# Altium PCB PCB1.PcbDoc
Units mm, origin at the board's own origin, x right, y up, seen from the top; angles counter-clockwise.
Board outline 159.6 x 109.6 mm, 2 copper layers (Top Layer, Bottom Layer); 22 components, 44 nets, 987 pads, 44 vias.
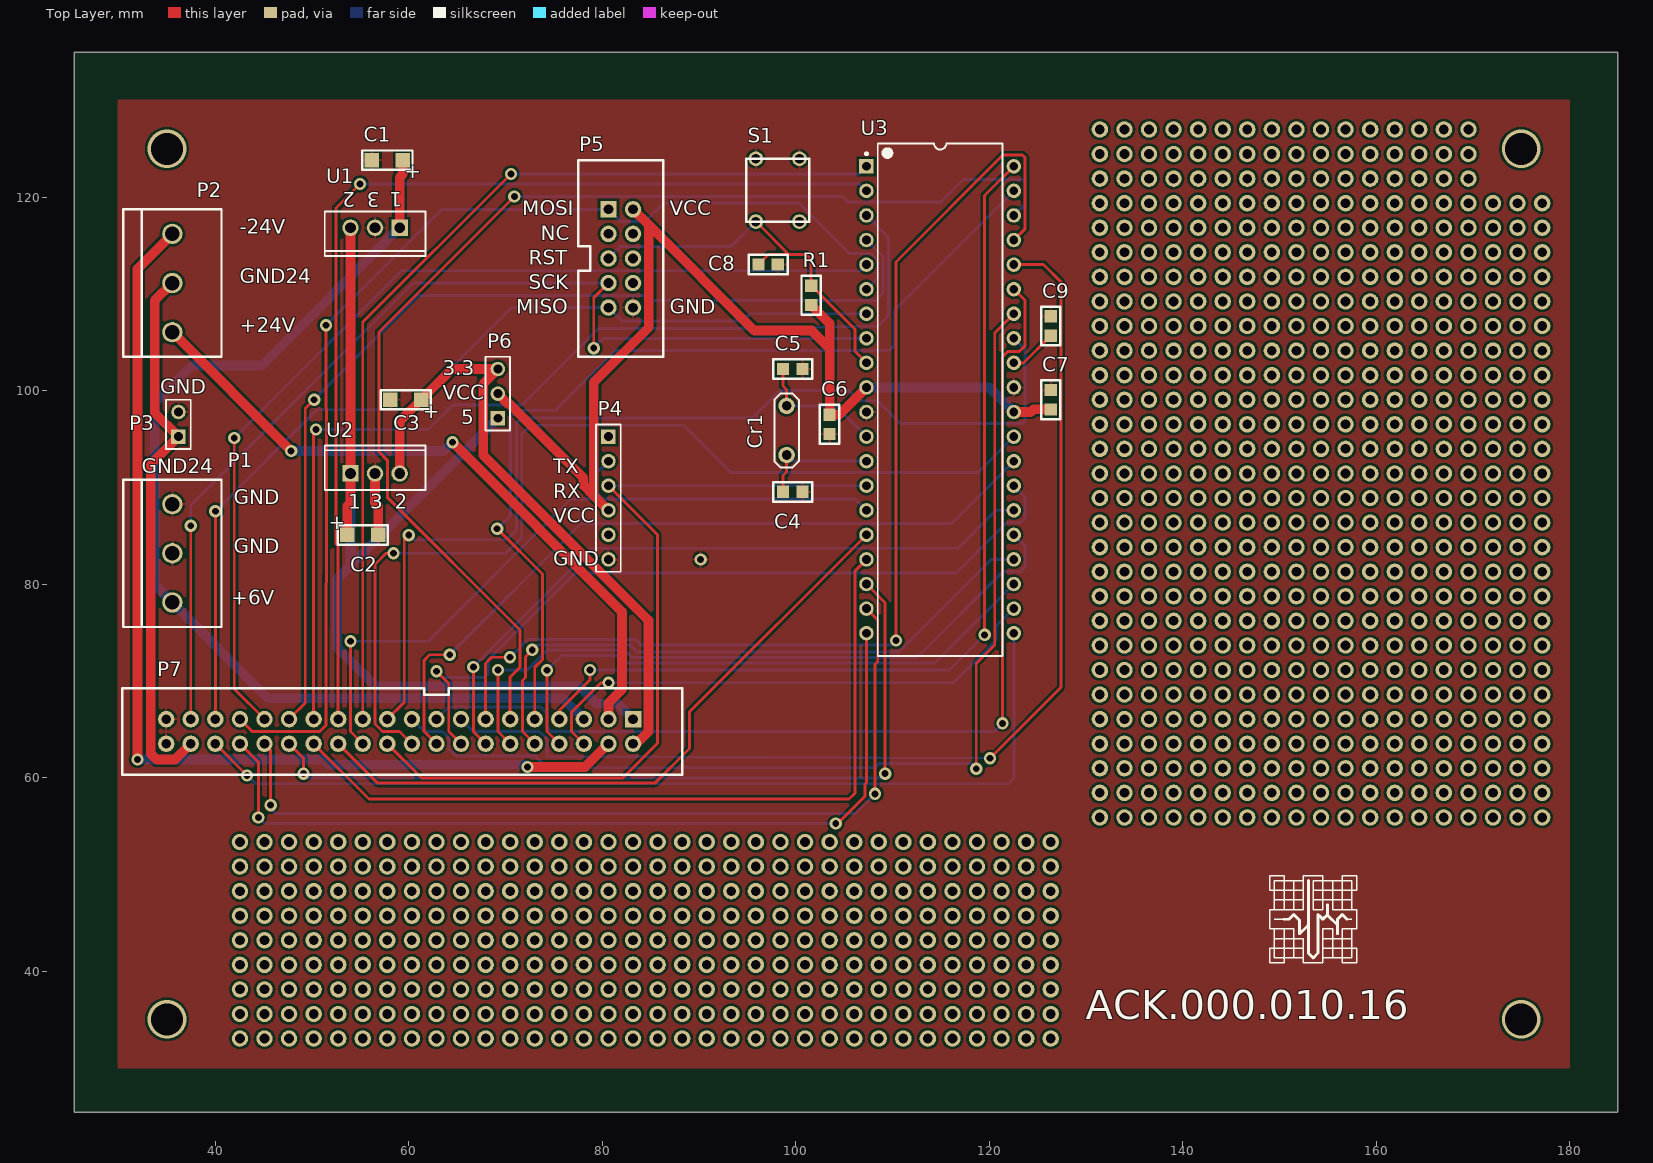
[diagram p0: Top Layer view]
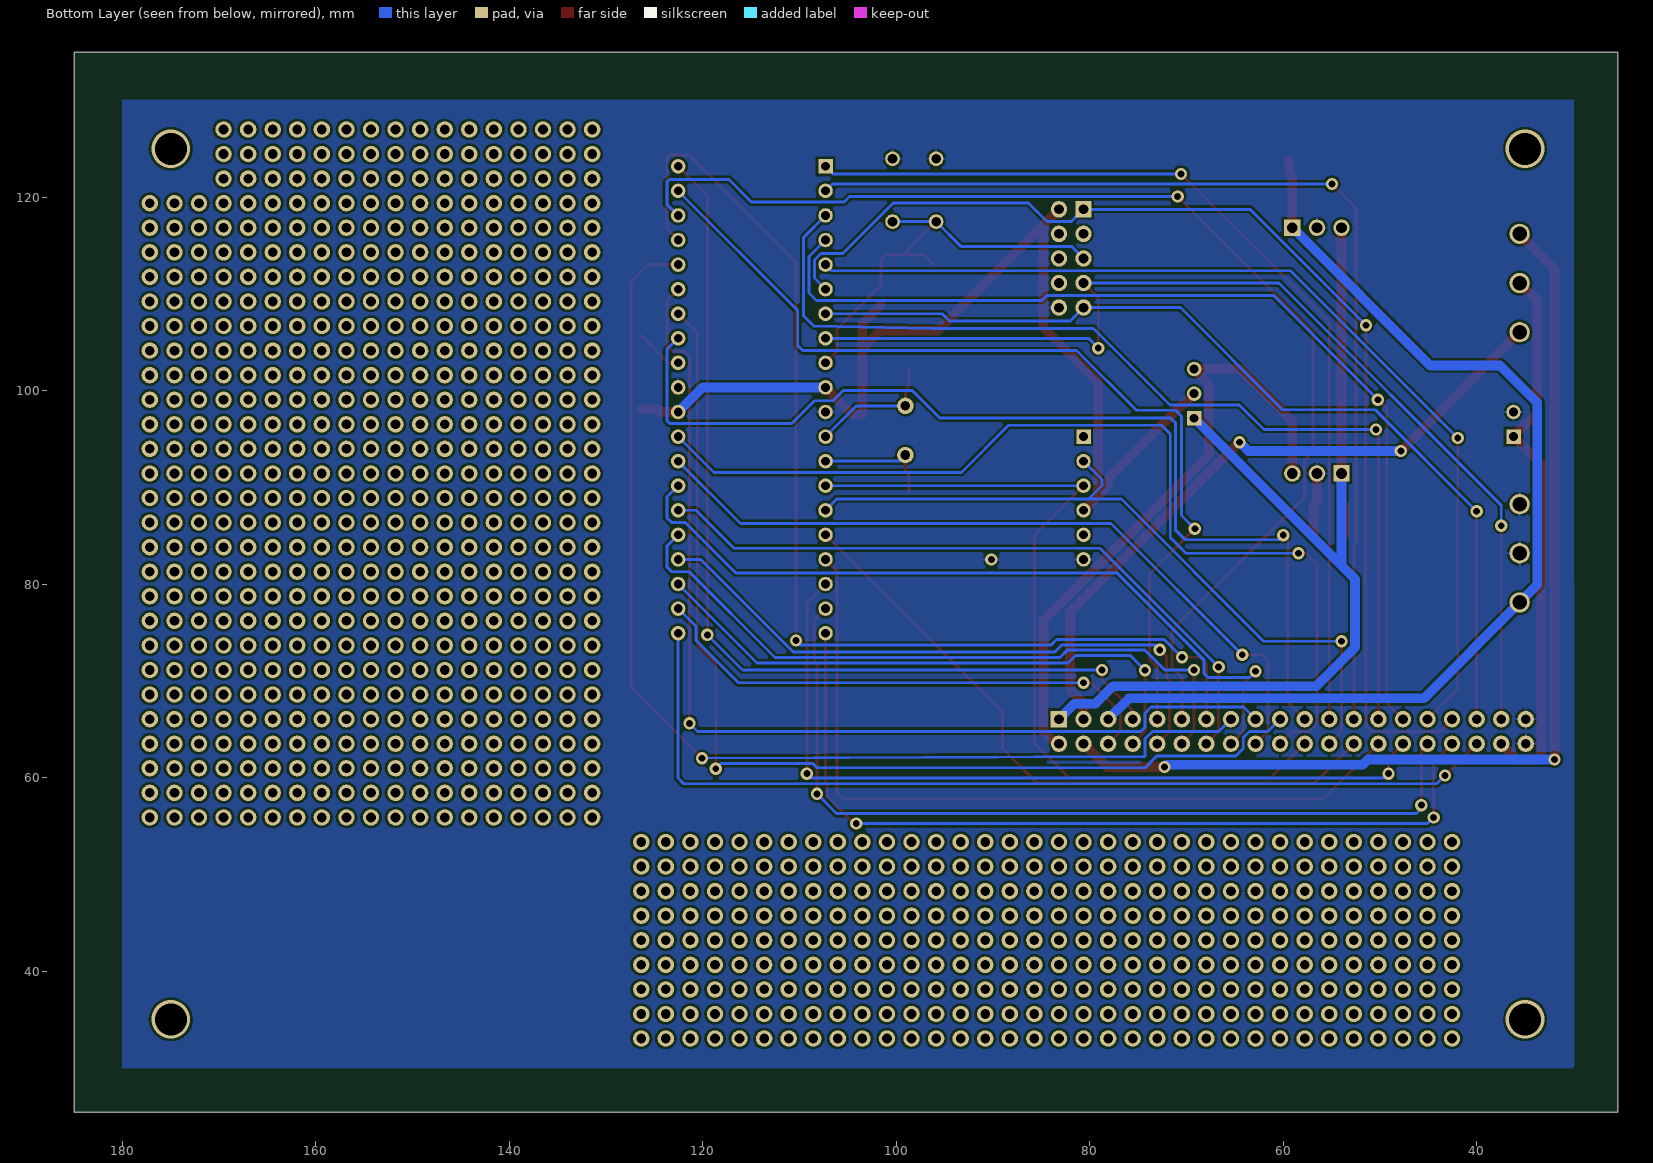
[diagram p1: Bottom Layer view, seen from below]

## Layer stack, top to bottom
Top Solder: solder mask 0.0102, Solder Resist, Dk 3.5
Top Layer: signal copper 0.0356
Dielectric 1: dielectric 0.32, FR-4, Dk 4.8
Bottom Layer: signal copper 0.0356
Bottom Solder: solder mask 0.0102, Solder Resist, Dk 3.5

## Board outline
25.4,25.4 185,25.4 185,135 25.4,135

## Design rules (kind name [scope] priority, off if disabled: settings)
Clearance Clearance_1 [All] p1: gap=0.254
Clearance Clearance_poly [InPolygon] p2: gap=0.44
HoleSize [All] p1: absolutevalues=TRUE maxlimit=5 minlimit=0.025 maxpercent=80.000 minpercent=20.000
PolygonConnect [All] p1: connectstyle=Relief reliefconductorwidth=0.254 reliefentries=4 polygonreliefangle="90 Angle" airgapwidth=0.254
RoutingVias [All] p1: holewidth=0.711 width=1.27 viastyle="Through Hole" minholewidth=0.711 minwidth=1.27 maxholewidth=0.711 maxwidth=1.27
SilkToSilkClearance [All] p1 off: silktosilkclearance=0.254
SilkToSolderMaskClearance [IsPad] p1 off: minsilkscreentomaskgap=0.254 clearancetoexposedcopper=TRUE
SolderMaskExpansion [All] p1: expansion=0.102
Width Width_1 [InNetClass('power')] p1: maxlimit=1 minlimit=1 preferedwidth=1 minimp=50.000000 maximp=50.000000 favimp=50.000000
Width [InNetClass('other')] p2: maxlimit=0.3 minlimit=0.3 preferedwidth=0.3 minimp=50.000000 maximp=50.000000 favimp=50.000000
27 further rules are at their usual default settings.

## Classes and differential pairs
net class other: NetC4_2 NetC5_2 NetC9_1 PA0 PA1 PA2 PA3 PA4 PA5 PA6 PA7 PB0 PB1 PB2 PB3 PB4 PB5 PB6 PB7 PC0 PC1 PC2 PC3 PC4 PC5 PC6 PC7 PD0 PD1 PD2 PD3 PD4 PD5 PD6 PD7 RESET
net class power: 3V 5V +6V +24V -24V GND GND24 VCC

## Components (designator, comment, footprint, x,y, rotation, side; value= is the part's Value field where it differs from the comment)
C1 "" C_TECAP_A 57.785,123.825 r180 top
C2 "" C_TECAP_A 55.245,85.09 r0 top
C3 "" C_TECAP_A 59.69,99.06 r180 top
C4 "22pF" C_0805 99.695,89.535 r180 top
C5 "22pF" C_0805 99.695,102.235 r180 top
C6 "0.1uF" C_0805 103.505,96.52 r270 top
C7 "0.1uF" C_0805 126.365,99.06 r90 top
C8 "0.1uF" C_0805 97.155,113.03 r0 top
C9 "0.1uF" C_0805 126.365,106.68 r90 top
Cr1 "16MHz" quarts_2.54 99.06,95.885 r270 top
P1 "MPW-3" MPW-3 35.56,83.185 r270 top
P2 "MPW-3" MPW-3 35.56,111.125 r270 top
P3 "Header 2" HDR1X2 36.195,95.25 r90 top
P4 "Header 6" HDR1X6 80.645,95.25 r270 top
P5 "IDC-10" IDC-10 81.915,113.665 r0 top
P6 "Header 3" HDR1X3 69.215,97.155 r90 top
P7 "IDC-40" IDC-40 62.865,64.77 r270 top
R1 "10k" R_0805 101.6,109.855 r90 top
S1 "button 4 pin" "button 4 pin" 95.885,117.475 r90 top
U1 "" TO220ABN 56.515,116.84 r180 top
U2 "" TO220ABN 56.515,91.44 r0 top
U3 "ATmega32A-PU" 40P6 114.935,99.06 r0 top

## Footprints (in the part's own frame and the unit in brackets; to place one, negate y for a bottom-side part, rotate by r counter-clockwise, add the part's x,y. Pads: shape width x height; smd on the part's side, far side on the other; paste and mask are expansions set on the pad)
40P6 [mm] "DIP, 40-Leads, Row Spacing 15.24mm, Pitch 2.54mm, Body 52.2x13.95mm"
  rect 1.5x1.5 hole 0.9: 1(-7.62,24.13)
  round 1.5 hole 0.9: 2(-7.62,21.59) 3(-7.62,19.05) 4(-7.62,16.51) 5(-7.62,13.97) 6(-7.62,11.43) 7(-7.62,8.89) 8(-7.62,6.35) 9(-7.62,3.81) 10(-7.62,1.27) 11(-7.62,-1.27) 12(-7.62,-3.81) 13(-7.62,-6.35) 14(-7.62,-8.89) 15(-7.62,-11.43) 16(-7.62,-13.97) 17(-7.62,-16.51) 18(-7.62,-19.05) 19(-7.62,-21.59) 20(-7.62,-24.13) 21(7.62,-24.13) 22(7.62,-21.59) 23(7.62,-19.05) 24(7.62,-16.51) 25(7.62,-13.97) 26(7.62,-11.43) 27(7.62,-8.89) 28(7.62,-6.35) 29(7.62,-3.81) 30(7.62,-1.27) 31(7.62,1.27) 32(7.62,3.81) 33(7.62,6.35) 34(7.62,8.89) 35(7.62,11.43) 36(7.62,13.97) 37(7.62,16.51) 38(7.62,19.05) 39(7.62,21.59) 40(7.62,24.13)
  silkscreen extent -7.74,-26.5 6.45,26.5, body extent -7.05,-26.47 7.05,26.47, height 4.83
"button 4 pin" [mm]
  round 1.524 hole 1: 1(0,0) 2(6.5,0) 3(0,-4.5) 4(6.5,-4.5)
  silkscreen extent 0,-5.5 6.5,1
C_0805 [mm]
  rect 1.27x1.27 smd: 1(-1,0) 2(1,0)
  silkscreen extent -2,-1 2,1
C_TECAP_A [mm]
  rect 1.5x1.5 smd: 2(1.6,0) +(-1.6,0)
  silkscreen extent -2.6,-1 2.6,1
HDR1X2 [mm] "Connector; Header; 2 Position"
  rect 1.5x1.5 hole 0.9: 1(0,0)
  round 1.5 hole 0.9: 2(2.54,0)
  silkscreen extent -1.27,-1.27 3.81,1.27
HDR1X3 [mm] "Connector; Header; 3 Position"
  rect 1.5x1.5 hole 0.9: 1(0,0)
  round 1.5 hole 0.9: 2(2.54,0) 3(5.08,0)
  silkscreen extent -1.27,-1.27 6.35,1.27
HDR1X6 [mm] "Connector; Header; 6 Position"
  rect 1.5x1.5 hole 0.9: 1(0,0)
  round 1.5 hole 0.9: 2(2.54,0) 3(5.08,0) 4(7.62,0) 5(10.16,0) 6(12.7,0)
  silkscreen extent -1.27,-1.27 13.97,1.27
IDC-10 [mm]
  rect 1.7x1.7 hole 1: 1(-1.27,5.08)
  round 1.7 hole 1: 2(1.27,5.08) 3(-1.27,2.54) 4(1.27,2.54) 5(-1.27,0) 6(1.27,0) 7(-1.27,-2.54) 8(1.27,-2.54) 9(-1.27,-5.08) 10(1.27,-5.08)
  silkscreen extent -4.4,-10.17 4.4,10.17
IDC-40 [mm]
  rect 1.7x1.7 hole 1: 1(-1.27,20.32)
  round 1.7 hole 1: 2(1.27,20.32) 3(-1.27,17.78) 4(1.27,17.78) 5(-1.27,15.24) 6(1.27,15.24) 7(-1.27,12.7) 8(1.27,12.7) 9(-1.27,10.16) 10(1.27,10.16) 11(-1.27,7.62) 12(1.27,7.62) 13(-1.27,5.08) 14(1.27,5.08) 15(-1.27,2.54) 16(1.27,2.54) 17(-1.27,0) 18(1.27,0) 19(-1.27,-2.54) 20(1.27,-2.54) 21(-1.27,-5.08) 22(1.27,-5.08) 23(-1.27,-7.62) 24(1.27,-7.62) 25(-1.27,-10.16) 26(1.27,-10.16) 27(-1.27,-12.7) 28(1.27,-12.7) 29(-1.27,-15.24) 30(1.27,-15.24) 31(-1.27,-17.78) 32(1.27,-17.78) 33(-1.27,-20.32) 34(1.27,-20.32) 35(-1.27,-22.86) 36(1.27,-22.86) 37(-1.27,-25.4) 38(1.27,-25.4) 39(-1.27,-27.94) 40(1.27,-27.94)
  silkscreen extent -4.47,-32.5 4.48,25.4
MPW-3 [mm]
  round 2.1 hole 1.5: 1(-5.08,0) 2(0,0) 3(5.08,0)
  silkscreen extent -7.62,-5.08 7.62,5.08
quarts_2.54 [mm]
  round 1.7 hole 1: 1(-2.54,0) 2(2.54,0)
  silkscreen extent -3.81,-1.27 3.81,1.27
R_0805 [mm]
  rect 1.27x1.27 smd: 1(-1,0) 2(1,0)
  silkscreen extent -2,-1 2,1
TO220ABN [mm] "TO, Thru-Hole, Vertical, Heatsink Mounted; 3 In-Line Leads; Pitch 2.54 mm; Pin sequence 1, 3, 2"
  rect 1.7x1.7 hole 1.1: 1(-2.54,0)
  round 1.7 hole 1.1: 2(2.54,0) 3(0,0)
  silkscreen extent -5.2,-1.7 5.2,2.9

## Part data
C1 C2 C3: library part capacitor_TECAP_SMD_A
C4 C5 C6 C7 C8 C9: library part "capacitor 0805"
Cr1: library part quarts_2.54
P3: "Header, 2-Pin"
P4: "Header, 6-Pin"
P5: "разъем 4130"
P6: "Header, 3-Pin"
P7: "разъем 2529"
R1: library part "resistor 0805"
S1: library part "button 4 pin2"
U1 U2: library part L7805ABV, "Precision 1A Regulator"
U3: "8-bit AVR Microcontroller, 32KB Flash, 1KB EEPROM, 2KB SRAM, 40-pin PDIP, Industrial Grade (-40°C to 85°C)"

## Free pads (board coordinates)
  round 1.7 hole 1: 3(131.445,127) 4(133.985,127) 4(136.525,127) 4(139.065,127) 4(141.605,127) 4(144.145,127) 4(146.685,127) 4(149.225,127) 4(151.765,127) 4(154.305,127) 4(156.845,127) 4(159.385,127) 4(161.925,127) 4(164.465,127) 4(167.005,127) 4(169.545,127) 4(172.085,119.38) 4(174.625,119.38) 4(177.165,119.38) 5(131.445,78.74) 5(131.445,124.46) 6(133.985,78.74) 6(133.985,124.46) 6(136.525,78.74) 6(136.525,124.46) 6(139.065,78.74) 6(139.065,124.46) 6(141.605,78.74) 6(141.605,124.46) 6(144.145,78.74) 6(144.145,124.46) 6(146.685,78.74) 6(146.685,124.46) 6(149.225,78.74) 6(149.225,124.46) 6(151.765,78.74) 6(151.765,124.46) 6(154.305,78.74) 6(154.305,124.46) 6(156.845,78.74) 6(156.845,124.46) 6(159.385,78.74) 6(159.385,124.46) 6(161.925,78.74) 6(161.925,124.46) 6(164.465,78.74) 6(164.465,124.46) 6(167.005,78.74) 6(167.005,124.46) 6(169.545,78.74) 6(169.545,124.46) 6(172.085,71.12) 6(172.085,116.84) 6(174.625,71.12) 6(174.625,116.84) 6(177.165,71.12) 6(177.165,116.84) 7(131.445,76.2) 7(131.445,121.92) 8(133.985,76.2) 8(133.985,121.92) 8(136.525,76.2) 8(136.525,121.92) 8(139.065,76.2) 8(139.065,121.92) 8(141.605,76.2) 8(141.605,121.92) 8(144.145,76.2) 8(144.145,121.92) 8(146.685,76.2) 8(146.685,121.92) 8(149.225,76.2) 8(149.225,121.92) 8(151.765,76.2) 8(151.765,121.92) 8(154.305,76.2) 8(154.305,121.92) 8(156.845,76.2) 8(156.845,121.92) 8(159.385,76.2) 8(159.385,121.92) 8(161.925,76.2) 8(161.925,121.92) 8(164.465,76.2) 8(164.465,121.92) 8(167.005,76.2) 8(167.005,121.92) 8(169.545,76.2) 8(169.545,121.92) 8(172.085,68.58) 8(172.085,114.3) 8(174.625,68.58) 8(174.625,114.3) 8(177.165,68.58) 8(177.165,114.3) 9(131.445,73.66) 9(131.445,119.38) 10(133.985,73.66) 10(133.985,119.38) 10(136.525,73.66) 10(136.525,119.38) 10(139.065,73.66) 10(139.065,119.38) 10(141.605,73.66) 10(141.605,119.38) 10(144.145,73.66) 10(144.145,119.38) 10(146.685,73.66) 10(146.685,119.38) 10(149.225,73.66) 10(149.225,119.38) 10(151.765,73.66) 10(151.765,119.38) 10(154.305,73.66) 10(154.305,119.38) 10(156.845,73.66) 10(156.845,119.38) 10(159.385,73.66) 10(159.385,119.38) 10(161.925,73.66) 10(161.925,119.38) 10(164.465,73.66) 10(164.465,119.38) 10(167.005,73.66) 10(167.005,119.38) 10(169.545,73.66) 10(169.545,119.38) 10(172.085,66.04) 10(172.085,111.76) 10(174.625,66.04) 10(174.625,111.76) 10(177.165,66.04) 10(177.165,111.76) 11(131.445,71.12) 11(131.445,116.84) 12(133.985,71.12) 12(133.985,116.84) 12(136.525,71.12) 12(136.525,116.84) 12(139.065,71.12) 12(139.065,116.84) 12(141.605,71.12) 12(141.605,116.84) 12(144.145,71.12) 12(144.145,116.84) 12(146.685,71.12) 12(146.685,116.84) 12(149.225,71.12) 12(149.225,116.84) 12(151.765,71.12) 12(151.765,116.84) 12(154.305,71.12) 12(154.305,116.84) 12(156.845,71.12) 12(156.845,116.84) 12(159.385,71.12) 12(159.385,116.84) 12(161.925,71.12) 12(161.925,116.84) 12(164.465,71.12) 12(164.465,116.84) 12(167.005,71.12) 12(167.005,116.84) 12(169.545,71.12) 12(169.545,116.84) 12(172.085,63.5) 12(172.085,109.22) 12(174.625,63.5) 12(174.625,109.22) 12(177.165,63.5) 12(177.165,109.22) 13(131.445,68.58) 13(131.445,114.3) 14(133.985,68.58) 14(133.985,114.3) 14(136.525,68.58) 14(136.525,114.3) 14(139.065,68.58) 14(139.065,114.3) 14(141.605,68.58) 14(141.605,114.3) 14(144.145,68.58) 14(144.145,114.3) 14(146.685,68.58) 14(146.685,114.3) 14(149.225,68.58) 14(149.225,114.3) 14(151.765,68.58) 14(151.765,114.3) 14(154.305,68.58) 14(154.305,114.3) 14(156.845,68.58) 14(156.845,114.3) 14(159.385,68.58) 14(159.385,114.3) 14(161.925,68.58) 14(161.925,114.3) 14(164.465,68.58) 14(164.465,114.3) 14(167.005,68.58) 14(167.005,114.3) 14(169.545,68.58) 14(169.545,114.3) 14(172.085,60.96) 14(172.085,106.68) 14(174.625,60.96) 14(174.625,106.68) 14(177.165,60.96) 14(177.165,106.68) 15(131.445,66.04) 15(131.445,111.76) 16(133.985,66.04) 16(133.985,111.76) 16(136.525,66.04) 16(136.525,111.76) 16(139.065,66.04) 16(139.065,111.76) 16(141.605,66.04) 16(141.605,111.76) 16(144.145,66.04) 16(144.145,111.76) 16(146.685,66.04) 16(146.685,111.76) 16(149.225,66.04) 16(149.225,111.76) 16(151.765,66.04) 16(151.765,111.76) 16(154.305,66.04) 16(154.305,111.76) 16(156.845,66.04) 16(156.845,111.76) 16(159.385,66.04) 16(159.385,111.76) 16(161.925,66.04) 16(161.925,111.76) 16(164.465,66.04) 16(164.465,111.76) 16(167.005,66.04) 16(167.005,111.76) 16(169.545,66.04) 16(169.545,111.76) 16(172.085,58.42) 16(172.085,104.14) 16(174.625,58.42) 16(174.625,104.14) 16(177.165,58.42) 16(177.165,104.14) 17(42.545,43.18) 17(45.085,43.18) 17(47.625,43.18) 17(50.165,43.18) 17(52.705,43.18) 17(55.245,43.18) 17(57.785,43.18) 17(60.325,43.18) 17(62.865,43.18) 17(65.405,43.18) 17(67.945,43.18) 17(70.485,43.18) 17(73.025,43.18) 17(75.565,43.18) 17(78.105,43.18) 17(80.645,43.18) 17(83.185,43.18) 17(85.725,43.18) 17(88.265,43.18) 17(90.805,43.18) 17(93.345,43.18) 17(95.885,43.18) 17(98.425,43.18) 17(100.965,43.18) 17(103.505,43.18) 17(106.045,43.18) 17(108.585,43.18) 17(111.125,43.18) 17(113.665,43.18) 17(116.205,43.18) 17(118.745,43.18) 17(121.285,43.18) 17(123.825,43.18) 17(126.365,43.18) 17(131.445,63.5) 17(131.445,109.22) 18(133.985,63.5) 18(133.985,109.22) 18(136.525,63.5) 18(136.525,109.22) 18(139.065,63.5) 18(139.065,109.22) 18(141.605,63.5) 18(141.605,109.22) 18(144.145,63.5) 18(144.145,109.22) 18(146.685,63.5) 18(146.685,109.22) 18(149.225,63.5) 18(149.225,109.22) 18(151.765,63.5) 18(151.765,109.22) 18(154.305,63.5) 18(154.305,109.22) 18(156.845,63.5) 18(156.845,109.22) 18(159.385,63.5) 18(159.385,109.22) 18(161.925,63.5) 18(161.925,109.22) 18(164.465,63.5) 18(164.465,109.22) 18(167.005,63.5) 18(167.005,109.22) 18(169.545,63.5) 18(169.545,109.22) 18(172.085,55.88) 18(172.085,101.6) 18(174.625,55.88) 18(174.625,101.6) 18(177.165,55.88) 18(177.165,101.6) 19(42.545,40.64) 19(45.085,40.64) 19(47.625,40.64) 19(50.165,40.64) 19(52.705,40.64) 19(55.245,40.64) 19(57.785,40.64) 19(60.325,40.64) 19(62.865,40.64) 19(65.405,40.64) 19(67.945,40.64) 19(70.485,40.64) 19(73.025,40.64) 19(75.565,40.64) 19(78.105,40.64) 19(80.645,40.64) 19(83.185,40.64) 19(85.725,40.64) 19(88.265,40.64) 19(90.805,40.64) 19(93.345,40.64) 19(95.885,40.64) 19(98.425,40.64) 19(100.965,40.64) 19(103.505,40.64) 19(106.045,40.64) 19(108.585,40.64) 19(111.125,40.64) 19(113.665,40.64) 19(116.205,40.64) 19(118.745,40.64) 19(121.285,40.64) 19(123.825,40.64) 19(126.365,40.64) 19(131.445,60.96) 19(131.445,106.68) 20(133.985,60.96) 20(133.985,106.68) 20(136.525,60.96) 20(136.525,106.68) 20(139.065,60.96) 20(139.065,106.68) 20(141.605,60.96) 20(141.605,106.68) 20(144.145,60.96) 20(144.145,106.68) 20(146.685,60.96) 20(146.685,106.68) 20(149.225,60.96) 20(149.225,106.68) 20(151.765,60.96) 20(151.765,106.68) 20(154.305,60.96) 20(154.305,106.68) 20(156.845,60.96) 20(156.845,106.68) 20(159.385,60.96) 20(159.385,106.68) 20(161.925,60.96) 20(161.925,106.68) 20(164.465,60.96) 20(164.465,106.68) 20(167.005,60.96) 20(167.005,106.68) 20(169.545,60.96) 20(169.545,106.68) 20(172.085,99.06) 20(174.625,99.06) 20(177.165,99.06) 21(42.545,38.1) 21(42.545,48.26) 21(42.545,50.8) 21(42.545,53.34) 21(45.085,38.1) 21(45.085,48.26) 21(45.085,50.8) 21(45.085,53.34) 21(47.625,38.1) 21(47.625,48.26) 21(47.625,50.8) 21(47.625,53.34) 21(50.165,38.1) 21(50.165,48.26) 21(50.165,50.8) 21(50.165,53.34) 21(52.705,38.1) 21(52.705,48.26) 21(52.705,50.8) 21(52.705,53.34) 21(55.245,38.1) 21(55.245,48.26) 21(55.245,50.8) 21(55.245,53.34) 21(57.785,38.1) 21(57.785,48.26) 21(57.785,50.8) 21(57.785,53.34) 21(60.325,38.1) 21(60.325,48.26) 21(60.325,50.8) 21(60.325,53.34) 21(62.865,38.1) 21(62.865,48.26) 21(62.865,50.8) 21(62.865,53.34) 21(65.405,38.1) 21(65.405,48.26) 21(65.405,50.8) 21(65.405,53.34) 21(67.945,38.1) 21(67.945,48.26) 21(67.945,50.8) 21(67.945,53.34) 21(70.485,38.1) 21(70.485,48.26) 21(70.485,50.8) 21(70.485,53.34) 21(73.025,38.1) 21(73.025,48.26) 21(73.025,50.8) 21(73.025,53.34) 21(75.565,38.1) 21(75.565,48.26) 21(75.565,50.8) 21(75.565,53.34) 21(78.105,38.1) 21(78.105,48.26) 21(78.105,50.8) 21(78.105,53.34) 21(80.645,38.1) 21(80.645,48.26) 21(80.645,50.8) 21(80.645,53.34) 21(83.185,38.1) 21(83.185,48.26) 21(83.185,50.8) 21(83.185,53.34) 21(85.725,38.1) 21(85.725,48.26) 21(85.725,50.8) 21(85.725,53.34) 21(88.265,38.1) 21(88.265,48.26) 21(88.265,50.8) 21(88.265,53.34) 21(90.805,38.1) 21(90.805,48.26) 21(90.805,50.8) 21(90.805,53.34) 21(93.345,38.1) 21(93.345,48.26) 21(93.345,50.8) 21(93.345,53.34) 21(95.885,38.1) 21(95.885,48.26) 21(95.885,50.8) 21(95.885,53.34) 21(98.425,38.1) 21(98.425,48.26) 21(98.425,50.8) 21(98.425,53.34) 21(100.965,38.1) 21(100.965,48.26) 21(100.965,50.8) 21(100.965,53.34) 21(103.505,38.1) 21(103.505,48.26) 21(103.505,50.8) 21(103.505,53.34) 21(106.045,38.1) 21(106.045,48.26) 21(106.045,50.8) 21(106.045,53.34) 21(108.585,38.1) 21(108.585,48.26) 21(108.585,50.8) 21(108.585,53.34) 21(111.125,38.1) 21(111.125,48.26) 21(111.125,50.8) 21(111.125,53.34) 21(113.665,38.1) 21(113.665,48.26) 21(113.665,50.8) 21(113.665,53.34) 21(116.205,38.1) 21(116.205,48.26) 21(116.205,50.8) 21(116.205,53.34) 21(118.745,38.1) 21(118.745,48.26) 21(118.745,50.8) 21(118.745,53.34) 21(121.285,38.1) 21(121.285,48.26) 21(121.285,50.8) 21(121.285,53.34) 21(123.825,38.1) 21(123.825,48.26) 21(123.825,50.8) 21(123.825,53.34) 21(126.365,38.1) 21(126.365,48.26) 21(126.365,50.8) 21(126.365,53.34) 21(131.445,58.42) 21(131.445,104.14) 22(133.985,58.42) 22(133.985,104.14) 22(136.525,58.42) 22(136.525,104.14) 22(139.065,58.42) 22(139.065,104.14) 22(141.605,58.42) 22(141.605,104.14) 22(144.145,58.42) 22(144.145,104.14) 22(146.685,58.42) 22(146.685,104.14) 22(149.225,58.42) 22(149.225,104.14) 22(151.765,58.42) 22(151.765,104.14) 22(154.305,58.42) 22(154.305,104.14) 22(156.845,58.42) 22(156.845,104.14) 22(159.385,58.42) 22(159.385,104.14) 22(161.925,58.42) 22(161.925,104.14) 22(164.465,58.42) 22(164.465,104.14) 22(167.005,58.42) 22(167.005,104.14) 22(169.545,58.42) 22(169.545,104.14) 22(172.085,96.52) 22(174.625,96.52) 22(177.165,96.52) 23(42.545,33.02) 23(42.545,35.56) 23(42.545,45.72) 23(45.085,33.02) 23(45.085,35.56) 23(45.085,45.72) 23(47.625,33.02) 23(47.625,35.56) 23(47.625,45.72) 23(50.165,33.02) 23(50.165,35.56) 23(50.165,45.72) 23(52.705,33.02) 23(52.705,35.56) 23(52.705,45.72) 23(55.245,33.02) 23(55.245,35.56) 23(55.245,45.72) 23(57.785,33.02) 23(57.785,35.56) 23(57.785,45.72) 23(60.325,33.02) 23(60.325,35.56) 23(60.325,45.72) 23(62.865,33.02) 23(62.865,35.56) 23(62.865,45.72) 23(65.405,33.02) 23(65.405,35.56) 23(65.405,45.72) 23(67.945,33.02) 23(67.945,35.56) 23(67.945,45.72) 23(70.485,33.02) 23(70.485,35.56) 23(70.485,45.72) 23(73.025,33.02) 23(73.025,35.56) 23(73.025,45.72) 23(75.565,33.02) 23(75.565,35.56) 23(75.565,45.72) 23(78.105,33.02) 23(78.105,35.56) 23(78.105,45.72) 23(80.645,33.02) 23(80.645,35.56) 23(80.645,45.72) 23(83.185,33.02) 23(83.185,35.56) 23(83.185,45.72) 23(85.725,33.02) 23(85.725,35.56) 23(85.725,45.72) 23(88.265,33.02) 23(88.265,35.56) 23(88.265,45.72) 23(90.805,33.02) 23(90.805,35.56) 23(90.805,45.72) 23(93.345,33.02) 23(93.345,35.56) 23(93.345,45.72) 23(95.885,33.02) 23(95.885,35.56) 23(95.885,45.72) 23(98.425,33.02) 23(98.425,35.56) 23(98.425,45.72) 23(100.965,33.02) 23(100.965,35.56) 23(100.965,45.72) 23(103.505,33.02) 23(103.505,35.56) 23(103.505,45.72) 23(106.045,33.02) 23(106.045,35.56) 23(106.045,45.72) 23(108.585,33.02) 23(108.585,35.56) 23(108.585,45.72) 23(111.125,33.02) 23(111.125,35.56) 23(111.125,45.72) 23(113.665,33.02) 23(113.665,35.56) 23(113.665,45.72) 23(116.205,33.02) 23(116.205,35.56) 23(116.205,45.72) 23(118.745,33.02) 23(118.745,35.56) 23(118.745,45.72) 23(121.285,33.02) 23(121.285,35.56) 23(121.285,45.72) 23(123.825,33.02) 23(123.825,35.56) 23(123.825,45.72) 23(126.365,33.02) 23(126.365,35.56) 23(126.365,45.72) 23(131.445,101.6) 24(131.445,55.88) 24(133.985,55.88) 24(133.985,101.6) 24(136.525,55.88) 24(136.525,101.6) 24(139.065,55.88) 24(139.065,101.6) 24(141.605,55.88) 24(141.605,101.6) 24(144.145,55.88) 24(144.145,101.6) 24(146.685,55.88) 24(146.685,101.6) 24(149.225,55.88) 24(149.225,101.6) 24(151.765,55.88) 24(151.765,101.6) 24(154.305,55.88) 24(154.305,101.6) 24(156.845,55.88) 24(156.845,101.6) 24(159.385,55.88) 24(159.385,101.6) 24(161.925,55.88) 24(161.925,101.6) 24(164.465,55.88) 24(164.465,101.6) 24(167.005,55.88) 24(167.005,101.6) 24(169.545,55.88) 24(169.545,101.6) 24(172.085,93.98) 24(174.625,93.98) 24(177.165,93.98) 25(131.445,99.06) 26(133.985,99.06) 26(136.525,99.06) 26(139.065,99.06) 26(141.605,99.06) 26(144.145,99.06) 26(146.685,99.06) 26(149.225,99.06) 26(151.765,99.06) 26(154.305,99.06) 26(156.845,99.06) 26(159.385,99.06) 26(161.925,99.06) 26(164.465,99.06) 26(167.005,99.06) 26(169.545,99.06) 26(172.085,91.44) 26(174.625,91.44) 26(177.165,91.44) 27(131.445,96.52) 28(133.985,96.52) 28(136.525,96.52) 28(139.065,96.52) 28(141.605,96.52) 28(144.145,96.52) 28(146.685,96.52) 28(149.225,96.52) 28(151.765,96.52) 28(154.305,96.52) 28(156.845,96.52) 28(159.385,96.52) 28(161.925,96.52) 28(164.465,96.52) 28(167.005,96.52) 28(169.545,96.52) 28(172.085,88.9) 28(174.625,88.9) 28(177.165,88.9) 29(131.445,93.98) 30(133.985,93.98) 30(136.525,93.98) 30(139.065,93.98) 30(141.605,93.98) 30(144.145,93.98) 30(146.685,93.98) 30(149.225,93.98) 30(151.765,93.98) 30(154.305,93.98) 30(156.845,93.98) 30(159.385,93.98) 30(161.925,93.98) 30(164.465,93.98) 30(167.005,93.98) 30(169.545,93.98) 30(172.085,86.36) 30(174.625,86.36) 30(177.165,86.36) 31(131.445,91.44) 32(133.985,91.44) 32(136.525,91.44) 32(139.065,91.44) 32(141.605,91.44) 32(144.145,91.44) 32(146.685,91.44) 32(149.225,91.44) 32(151.765,91.44) 32(154.305,91.44) 32(156.845,91.44) 32(159.385,91.44) 32(161.925,91.44) 32(164.465,91.44) 32(167.005,91.44) 32(169.545,91.44) 32(172.085,83.82) 32(174.625,83.82) 32(177.165,83.82) 33(131.445,88.9) 34(133.985,88.9) 34(136.525,88.9) 34(139.065,88.9) 34(141.605,88.9) 34(144.145,88.9) 34(146.685,88.9) 34(149.225,88.9) 34(151.765,88.9) 34(154.305,88.9) 34(156.845,88.9) 34(159.385,88.9) 34(161.925,88.9) 34(164.465,88.9) 34(167.005,88.9) 34(169.545,88.9) 34(172.085,81.28) 34(174.625,81.28) 34(177.165,81.28) 35(131.445,86.36) 36(133.985,86.36) 36(136.525,86.36) 36(139.065,86.36) 36(141.605,86.36) 36(144.145,86.36) 36(146.685,86.36) 36(149.225,86.36) 36(151.765,86.36) 36(154.305,86.36) 36(156.845,86.36) 36(159.385,86.36) 36(161.925,86.36) 36(164.465,86.36) 36(167.005,86.36) 36(169.545,86.36) 36(172.085,78.74) 36(174.625,78.74) 36(177.165,78.74) 37(131.445,83.82) 38(133.985,83.82) 38(136.525,83.82) 38(139.065,83.82) 38(141.605,83.82) 38(144.145,83.82) 38(146.685,83.82) 38(149.225,83.82) 38(151.765,83.82) 38(154.305,83.82) 38(156.845,83.82) 38(159.385,83.82) 38(161.925,83.82) 38(164.465,83.82) 38(167.005,83.82) 38(169.545,83.82) 38(172.085,76.2) 38(174.625,76.2) 38(177.165,76.2) 39(131.445,81.28) 40(133.985,81.28) 40(136.525,81.28) 40(139.065,81.28) 40(141.605,81.28) 40(144.145,81.28) 40(146.685,81.28) 40(149.225,81.28) 40(151.765,81.28) 40(154.305,81.28) 40(156.845,81.28) 40(159.385,81.28) 40(161.925,81.28) 40(164.465,81.28) 40(167.005,81.28) 40(169.545,81.28) 40(172.085,73.66) 40(174.625,73.66) 40(177.165,73.66)

## Via types
v1: diameter 1.27, hole 0.711, Top Layer to Bottom Layer, 40 vias
v2: diameter 4, hole 3.3, Top Layer to Bottom Layer, 4 vias

## Nets (pads, with @x,y where several pads share a name; then routed paths per layer and width w, separated by ;. In a path a pad name is that pad's centre, name@x,y a point inside that pad or via, vN(x,y) a via of type N, cw(c..) or ccw(c..) an arc to the next point about the centre after c; other vN are vias at no path point)
3V: C3.+ P6.3 P7.2 U2.2 | length 65.1
  Top Layer w1: U2.2 59.055,96.825 C3.+ 64.465,102.235 P6.3 67.691,100.711 67.691,93.345 84.789,76.247 84.789,64.77 83.519,63.5 P7.2
5V: C2.+ P6.1 P7.1 U1.2 U2.1 | length 105.7
  Top Layer w1: C2.+ 53.645,88.087 53.975,88.417 U2.1 U1.2
  Bottom Layer w1: U2.1 53.975,81.915 ; P6.1 53.975,81.915 ; P7.1 81.581,67.644 79.397,67.644 77.589,69.452 56.583,69.452 52.578,73.457 52.578,80.518 53.975,81.915
+6V: C1.+ P1.3 P7.5 U1.1 | length 108.9
  Top Layer w1: U1.1 59.055,122.048 59.385,122.378 C1.+
  Bottom Layer w1: U1.1 44.806,102.591 37.592,102.591 33.731,98.73 33.731,79.934 P1.3 45.467,68.198 75.947,68.198 P7.5
+24V: P2.3 P7.3 | length 70.9
  Top Layer w1: P2.3 v1(47.845,93.76) ; v1(64.516,94.666) 82.042,77.14 82.042,69.113 80.645,67.716 P7.3
  Bottom Layer w1: v1(47.845,93.76) 63.611,93.76 v1(64.516,94.666)
-24V: P2.1 P7.4 | length 105.8
  Top Layer w1: v1(31.953,61.874) 31.953,112.598 P2.1 ; v1(72.264,61.088) 78.233,61.088 P7.4
  Bottom Layer w1: v1(31.953,61.874) 51.232,61.874 51.764,61.342 72.01,61.342 v1(72.264,61.088)
GND: C1.2 C2.2 C3.2 C4.1 C5.1 C6.2 C7.2 C8.2 C9.2 P1.1 P1.2 P3.2 P4.6 P5.10 P7.39 P7.40 S1.2 S1.4 U1.3 U2.3 U3.11 U3.31 | length 6.5
  Top Layer w1: U2.3 56.515,88.417 56.845,88.087 C2.2
  other v1: 90.17,82.55
GND24: P2.2 P3.1 P7.38 | length 56.7
  Top Layer w1: P2.2 33.731,109.296 33.731,97.714 P3.1 33.321,92.376 33.321,62.484 33.931,61.874 35.839,61.874 P7.38
NetC4_2: C4.2 Cr1.2 U3.13 | length 12.5
  Top Layer w0.3: C4.2 98.695,91.237 99.06,91.602 Cr1.2
  Bottom Layer w0.3: Cr1.2 99.695,92.71 U3.13
NetC5_2: C5.2 Cr1.1 U3.12 | length 13.5
  Top Layer w0.3: C5.2 98.695,100.492 99.06,100.127 Cr1.1
  Bottom Layer w0.3: Cr1.1 104.14,98.425 U3.12
NetC9_1: C9.1 U3.32 | length 5
  Top Layer w0.3: U3.32 123.555,102.87 C9.1
PA0: P7.7 U3.40 | length 98.4
  Top Layer w0.3: P7.7 75.565,66.929 78.74,70.104 v1(78.74,71.12) ; v1(119.532,74.752) 119.532,120.167 U3.40
  Bottom Layer w0.3: v1(78.74,71.12) 115.9,71.12 v1(119.532,74.752)
PA1: P7.9 U3.39 | length 98
  Top Layer w0.3: v1(69.139,85.725) 73.812,81.051 73.812,72.187 73.025,71.399 P7.9
  Bottom Layer w0.3: v1(69.139,85.725) 70.51,87.097 70.51,97.358 71.12,97.968 75.184,97.968 81.356,104.14 109.677,104.14 110.185,104.648 110.185,108.28 U3.39
PA2: P7.11 U3.38 | length 124.3
  Top Layer w0.3: P7.11 70.485,70.386 71.499,71.399 71.499,75.26 57.785,88.974 57.785,92.812 56.921,93.675 56.921,106.07 v1(70.917,120.066)
  Bottom Layer w0.3: v1(70.917,120.066) 104.826,120.066 105.41,119.482 114.96,119.482 117.297,121.818 123.444,121.818 123.723,121.539 123.723,119.278 U3.38
PA3: P7.13 U3.37 | length 115.8
  Top Layer w0.3: P7.13 67.945,71.806 68.58,72.441 v1(70.46,72.441) ; v1(110.363,74.168) 110.363,113.309 121.412,124.358 123.444,124.358 123.723,124.079 123.723,116.738 U3.37
  Bottom Layer w0.3: v1(70.46,72.441) 72.297,74.278 83.438,74.278 84.031,73.685 109.88,73.685 v1(110.363,74.168)
PA4: P7.15 U3.36 | length 115.2
  Top Layer w0.3: v1(120.084,61.994) 127.406,69.317 127.406,111.252 125.628,113.03 U3.36
  Bottom Layer w0.3: P7.15 66.675,64.77 73.528,64.77 74.295,64.003 74.295,62.174 v1(120.084,61.994)
PA5: P7.17 U3.35 | length 108.3
  Top Layer w0.3: v1(121.387,65.608) 121.387,103.505 121.92,104.038 123.114,104.038 123.723,104.648 123.723,109.322 U3.35
  Bottom Layer w0.3: P7.17 64.119,67.294 73.66,67.294 74.295,66.659 74.295,65.202 74.727,64.77 120.548,64.77 v1(121.387,65.608)
PA6: P7.19 U3.34 | length 110.1
  Top Layer w0.3: v1(118.669,60.909) 118.669,71.806 120.574,73.711 120.574,105.969 U3.34
  Bottom Layer w0.3: P7.19 61.595,64.77 63.5,64.77 64.135,64.135 64.135,62.992 64.881,62.246 73.034,62.246 74.27,61.011 108.204,61.011 108.633,61.44 118.138,61.44 v1(118.669,60.909)
PA7: P7.21 U3.33 | length 107.3
  Top Layer w0.3: P7.21 59.538,67.793 59.538,84.607 v1(59.995,85.065)
  Bottom Layer w0.3: v1(59.995,85.065) 60.477,84.582 70.129,84.582 71.12,85.573 71.12,96.647 71.628,97.155 95.479,97.155 98.349,100.025 105.486,100.025 106.553,98.958 108.458,98.958 110.795,96.622 123.444,96.622 123.723,96.901 123.723,104.242 U3.33
PB0: P7.23 U3.1 | length 99.8
  Top Layer w0.3: P7.23 55.245,107.086 v1(70.561,122.403)
  Bottom Layer w0.3: v1(70.561,122.403) 106.528,122.403 U3.1
PB1: P7.25 U3.2 | length 109.1
  Top Layer w0.3: P7.25 52.705,83.959 52.491,84.173 52.491,118.887 v1(54.966,121.361)
  Bottom Layer w0.3: v1(54.966,121.361) 106.604,121.361 U3.2
PB2: P7.27 U3.3 | length 105.3
  Top Layer w0.3: P7.27 50.165,95.733 v1(50.419,95.987)
  Bottom Layer w0.3: v1(50.419,95.987) 62.001,95.987 64.541,98.527 71.699,98.527 79.599,106.426 96.418,106.426 108.534,106.68 109.577,107.723 109.577,115.848 U3.3
PB3: P7.29 U3.4 | length 104.1
  Top Layer w0.3: P7.29 49.301,67.716 49.301,98.146 v1(50.216,99.06)
  Bottom Layer w0.3: v1(50.216,99.06) 61.011,109.855 84.43,109.855 84.963,109.322 108.255,109.322 109.023,110.09 109.023,113.862 U3.4
PB4: P7.31 U3.5 | length 103.1
  Top Layer w0.3: v1(41.961,95.098) 41.961,69.164 P7.31
  Bottom Layer w0.3: v1(41.961,95.098) 59.258,112.395 106.68,112.395 U3.5
PB5: P5.1 P7.33 U3.6 | length 120.3
  Top Layer w0.3: P7.33 43.815,64.77 50.8,64.77 51.435,65.405 51.486,94.818 51.486,98.095 51.435,98.146 v1(51.435,106.756)
  Bottom Layer w0.3: v1(51.435,106.756) 63.424,118.745 P5.1 81.915,117.475 84.43,117.475 86.36,119.405 100.319,119.405 105.54,114.184 107.793,114.184 108.469,113.508 108.469,111.644 U3.6
PB6: P5.9 P7.35 U3.7 | length 98.4
  Top Layer w0.3: P7.35 v1(40.005,87.528)
  Bottom Layer w0.3: v1(40.005,87.528) 50.498,98.021 60.071,98.021 70.635,108.585 P5.9 82.017,107.213 94.513,107.213 95.25,107.95 U3.7
PB7: P5.7 P7.37 U3.8 | length 110.8
  Top Layer w0.3: P7.37 v1(37.465,86.03) ; v1(79.121,104.394) 79.121,109.601 P5.7
  Bottom Layer w0.3: v1(37.465,86.03) 37.465,88.161 60.429,111.125 P5.7 ; v1(79.121,104.394) 80.137,105.41 U3.8
PC0: P7.6 U3.22 | length 54.8
  Top Layer w0.3: P7.6 76.835,64.77 76.835,66.751 79.883,69.799 v1(80.645,69.799)
  Bottom Layer w0.3: v1(80.645,69.799) 116.322,69.799 120.691,74.168 120.691,75.606 U3.22
PC1: P7.8 U3.23 | length 60.7
  Top Layer w0.3: v1(74.295,71.095) 74.295,64.77 P7.8
  Bottom Layer w0.3: v1(74.295,71.095) 75.817,72.616 81.476,72.616 82.238,71.854 114.399,71.854 U3.23
PC2: P7.10 U3.24 | length 64.9
  Top Layer w0.3: v1(72.771,73.203) 72.053,72.484 72.053,70.339 71.755,70.041 71.755,64.77 P7.10
  Bottom Layer w0.3: v1(72.771,73.203) 73.292,73.724 82.884,73.724 83.646,72.962 110.63,72.962 120.218,82.55 U3.24
PC3: P7.12 U3.25 | length 71.5
  Top Layer w0.3: v1(69.215,71.12) 69.215,64.77 P7.12
  Bottom Layer w0.3: v1(69.215,71.12) 72.242,71.12 74.293,73.17 82.33,73.17 83.092,72.408 112.54,72.408 121.412,81.28 123.215,81.28 123.723,81.788 123.723,83.922 U3.25
PC4: P7.14 U3.26 | length 71
  Top Layer w0.3: v1(66.675,71.425) 66.675,64.77 P7.14
  Bottom Layer w0.3: v1(66.675,71.425) 78.954,83.704 116.784,83.704 120.71,87.63 U3.26
PC5: P7.16 U3.27 | length 81.1
  Top Layer w0.3: v1(62.865,70.993) 64.135,69.723 64.135,64.77 P7.16
  Bottom Layer w0.3: v1(62.865,70.993) 63.502,70.356 67.791,70.356 68.174,70.739 68.174,72.136 77.202,81.164 116.622,81.164 121.818,86.36 123.215,86.36 123.723,86.868 123.723,89.002 U3.27
PC6: P7.18 U3.28 | length 78.6
  Top Layer w0.3: P7.18 61.595,64.77 61.595,72.136 62.154,72.695 v1(64.237,72.695)
  Bottom Layer w0.3: v1(64.237,72.695) 77.8,86.258 116.103,86.258 U3.28
PC7: P7.20 U3.29 | length 103
  Top Layer w0.3: v1(58.42,83.185) 57.658,83.185 56.515,82.042 56.515,65.532 57.277,64.77 59.055,64.77 P7.20
  Bottom Layer w0.3: v1(58.42,83.185) 70.053,83.185 71.679,84.811 71.679,95.504 72.593,96.418 88.392,96.418 93.269,91.542 118.847,91.542 U3.29
PD0: P4.3 P7.22 U3.14 | length 86.2
  Top Layer w0.3: P7.22 61.313,59.972 82.133,59.972 85.693,63.532 85.693,85.122 P4.3
  Bottom Layer w0.3: P4.3 U3.14
PD1: P4.2 P7.24 U3.15 | length 76.3
  Top Layer w0.3: v1(53.975,74.092) 53.975,64.77 P7.24
  Bottom Layer w0.3: v1(53.975,74.092) 62.024,74.092 76.731,88.798 80.137,88.798 ; P4.2 78.74,90.805 78.74,90.195 80.137,88.798 ; U3.15 106.147,88.798 80.137,88.798
PD2: P7.26 U3.16 | length 69.2
  Top Layer w0.3: P7.26 56.787,59.418 85.427,59.418 89.027,63.017 89.027,66.802 U3.16
PD3: P7.28 U3.17 | length 83.2
  Top Layer w0.3: P7.28 55.88,57.785 105.512,57.785 106.147,58.42 106.147,81.382 U3.17
PD4: P7.30 U3.18 | length 84.6
  Top Layer w0.3: P7.30 49.124,62.001 v1(49.124,60.401) ; U3.18 109.245,78.08 v1(109.245,60.401)
  Bottom Layer w0.3: v1(49.124,60.401) 49.553,59.972 108.816,59.972 v1(109.245,60.401)
PD5: P7.32 U3.19 | length 90.3
  Top Layer w0.3: P7.32 45.72,62.865 v1(45.72,57.15) ; U3.19 108.483,76.302 108.483,71.984 108.204,71.704 v1(108.204,58.318)
  Bottom Layer w0.3: v1(45.72,57.15) 45.72,56.794 46.23,56.284 106.17,56.284 v1(108.204,58.318)
PD6: P7.34 U3.20 | length 89.5
  Top Layer w0.3: P7.34 44.45,61.595 v1(44.45,55.88) ; v1(104.14,55.245) 104.343,55.245 107.163,58.064 107.163,59.334 107.315,59.487 U3.20
  Bottom Layer w0.3: v1(44.45,55.88) 45.085,55.245 v1(104.14,55.245)
PD7: P7.36 U3.21 | length 99.5
  Top Layer w0.3: P7.36 v1(43.282,60.223)
  Bottom Layer w0.3: v1(43.282,60.223) 44.145,59.36 121.971,59.36 122.555,59.944 U3.21
RESET: C8.1 P5.5 R1.2 S1.1 S1.3 U3.9 | length 45.3
  Top Layer w0.3: S1.1 99.289,114.071 ; C8.1 97.196,114.071 99.289,114.071 ; U3.9 106.147,104.038 106.147,106.308 R1.2 101.6,113.563 101.092,114.071 99.289,114.071
  Bottom Layer w0.3: P5.5 81.899,114.919 93.329,114.919 S1.1 S1.3
VCC: C6.1 C7.1 P4.4 P5.2 P6.2 R1.1 U3.10 U3.30 | length 110.8
  Top Layer w1: P6.2 70.231,98.679 70.358,98.679 78.054,90.983 78.054,90.221 79.121,89.154 ; P4.4 79.121,89.154 ; P5.2 84.811,117.119 ; R1.1 103.505,106.95 103.505,104.369 ; U3.10 104.505,97.52 C6.1 103.505,104.369 ; U3.30 124.308,97.79 124.578,98.06 C7.1 ; 79.121,89.154 79.121,100.863 84.811,106.553 84.811,117.119 ; 84.811,117.119 95.707,106.223 101.651,106.223 103.505,104.369
  Bottom Layer w1: U3.10 120.015,100.33 U3.30
pads on no net: P4.1 P4.5 P5.3 P5.4 P5.6 P5.8
copper on no net:
  other v2: 35,35 175,35 35,125 175,125

## Polygon pours and split planes (outlines as drawn)
GND on Top Layer "Top Layer-GND" (solid, pour order 0): 29.938,130.063 180.039,130.063 180.039,29.954 29.923,29.923 29.91,30.478 29.91,31.754 29.91,32.385
GND on Bottom Layer "Bottom Layer-GND" (solid, pour order 2): 29.943,130.067 180.042,130.067 180.042,29.948 29.924,29.924

## Silkscreen, mask and mechanical layers (free items; w line width, h text height)
Top Overlay:
  lines w0.15: 149.495,45.355 150.495,45.355 ; 152.495,42.355 150.495,42.355 ; 152.495,47.355 150.495,47.355 ; 152.495,48.355 150.495,48.355 ; 153.495,47.355 154.495,47.355 ; 154.495,42.355 157.495,42.355 157.995,42.355 157.995,40.855 156.495,40.855 156.495,41.355 156.495,43.355 ; 154.495,43.355 157.495,43.355 ; 155.495,41.355 155.495,43.355 ; 155.495,49.355 155.495,46.355 157.495,46.355 ; 156.495,46.355 156.495,49.355 ; 156.995,45.355 157.495,45.355 ; 157.495,47.355 155.495,47.355 ; 149.495,42.355 148.995,42.355 148.995,40.855 150.495,40.855 150.495,41.355 ; 149.495,42.355 149.495,43.355 ; 149.495,42.355 150.495,42.355 ; 149.495,42.355 149.495,41.355 150.495,41.355 ; 149.495,43.355 150.495,43.355 ; 149.495,43.355 149.495,44.355 ; 149.495,44.355 148.995,44.355 148.995,46.355 149.495,46.355 ; 149.495,44.355 150.495,44.355 ; 149.495,46.355 150.495,46.355 ; 149.495,46.355 149.495,47.355 ; 149.495,47.355 150.495,47.355 ; 149.495,47.355 149.495,48.355 ; 149.495,48.355 148.995,48.355 148.995,49.855 150.495,49.855 150.495,49.355 ; 149.495,48.355 149.495,49.355 150.495,49.355 ; 149.495,48.355 150.495,48.355 ; 150.495,41.355 150.495,42.355 ; 150.495,41.355 151.495,41.355 ; 150.495,42.355 150.495,43.355 ; 150.495,43.355 150.495,44.355 ; 150.495,43.355 152.495,43.355 152.495,41.355 ; 150.495,44.355 151.495,44.355 151.495,41.355 ; 150.495,46.355 151.495,46.355 ; 150.495,46.355 150.495,47.355 ; 150.495,47.355 150.495,48.355 ; 150.495,48.355 150.495,49.355 ; 150.495,49.355 151.495,49.355 ; 151.495,41.355 152.495,41.355 ; 151.495,46.355 152.495,46.355 152.495,49.355 ; 151.495,46.355 151.495,49.355 ; 151.495,49.355 152.495,49.355 ; 152.495,41.355 152.495,40.855 153.995,40.855 154.495,40.855 154.495,41.355 ; 152.495,49.355 152.495,49.855 154.495,49.855 154.495,49.355 ; 153.495,48.355 153.495,46.355 154.495,46.355 154.495,49.355 ; 153.495,48.355 157.495,48.355 157.995,48.355 157.995,49.855 156.495,49.855 156.495,49.355 ; 153.495,48.355 153.495,49.355 154.495,49.355 ; 154.495,41.355 157.495,41.355 157.495,44.355 ; 154.495,41.355 154.495,44.355 155.495,44.355 155.495,43.355 ; 154.495,47.355 155.495,47.355 ; 154.495,47.355 155.495,47.355 ; 154.495,49.355 156.495,49.355 ; 155.495,43.355 156.495,43.355 ; 156.495,43.355 156.495,44.355 157.495,44.355 ; 156.495,49.355 157.495,49.355 157.495,46.355 ; 157.495,44.355 157.995,44.355 157.995,46.355 157.495,46.355
  lines w0.3: 150.495,45.355 150.995,45.355 151.495,45.855 ; 152.995,49.355 152.995,44.755 ; 154.995,45.955 154.995,45.755 155.995,44.755 ; 154.995,46.555 154.995,46.855 ; 154.995,46.755 154.995,45.855 154.495,45.355 154.195,45.655 153.995,45.855 153.995,41.855 153.495,41.355 152.995,41.855 152.995,44.755 ; 155.995,43.855 155.995,45.355 156.495,45.855 156.995,45.355 ; 151.495,45.855 152.095,45.255 152.095,43.855 152.795,44.555 152.995,44.755 ; 151.495,45.855 151.495,45.855
  text "MOSI" at 71.755,118.11 h1.52
  text "VCC" at 86.995,118.11 h1.52
  text "NC" at 73.66,115.57 h1.52
  text "RST" at 72.39,113.03 h1.52
  text "SCK" at 72.39,110.49 h1.52
  text "MISO" at 71.12,107.95 h1.52
  text "GND" at 86.995,107.95 h1.52
  text "3.3" at 63.5,101.6 h1.52
  text "GND" at 34.29,99.695 h1.52
  text "VCC" at 63.5,99.06 h1.52
  text "5" at 65.405,96.52 h1.52
  text "GND24" at 32.385,91.44 h1.52
  text "TX" at 74.93,91.44 h1.52
  text "RX" at 74.93,88.9 h1.52
  text "VCC" at 74.93,86.36 h1.52
  text "GND" at 74.93,81.915 h1.52
  text "ACK.000.010.16" at 130,35 h3
Mechanical 1:
  lines w0.254: 30,30 180,30 180,130 30,130 30,30

## Text inside footprints (layer, text, board x,y; h text height)
C1: Top Overlay "+" at 61.285,123.225 h1.52 r180
C2: Top Overlay "+" at 51.745,85.69 h1.52
C3: Top Overlay "+" at 63.19,98.46 h1.52 r180
P1: Top Overlay "+6V" at 41.656,77.851 h1.52; Top Overlay "GND" at 41.91,88.265 h1.52; Top Overlay "GND" at 41.91,83.185 h1.52
P2: Top Overlay "-24V" at 42.545,116.205 h1.52; Top Overlay "GND24" at 42.545,111.125 h1.52; Top Overlay "+24V" at 42.545,106.045 h1.52
U1: Top Overlay "3" at 57.015,120.515 h1.5 r180; Top Overlay "2" at 54.475,120.515 h1.5 r180; Top Overlay "1" at 59.305,120.515 h1.5 r180
U2: Top Overlay "3" at 56.015,87.765 h1.5; Top Overlay "2" at 58.555,87.765 h1.5; Top Overlay "1" at 53.725,87.765 h1.5